# Altium PCB PCB2.PcbDoc
Units mm, origin at the board's own origin, x right, y up, seen from the top; angles counter-clockwise.
Board outline 45.7 x 53.5 mm, 2 copper layers (Top Layer, Bottom Layer); 23 components, 25 nets, 78 pads, 4 vias.
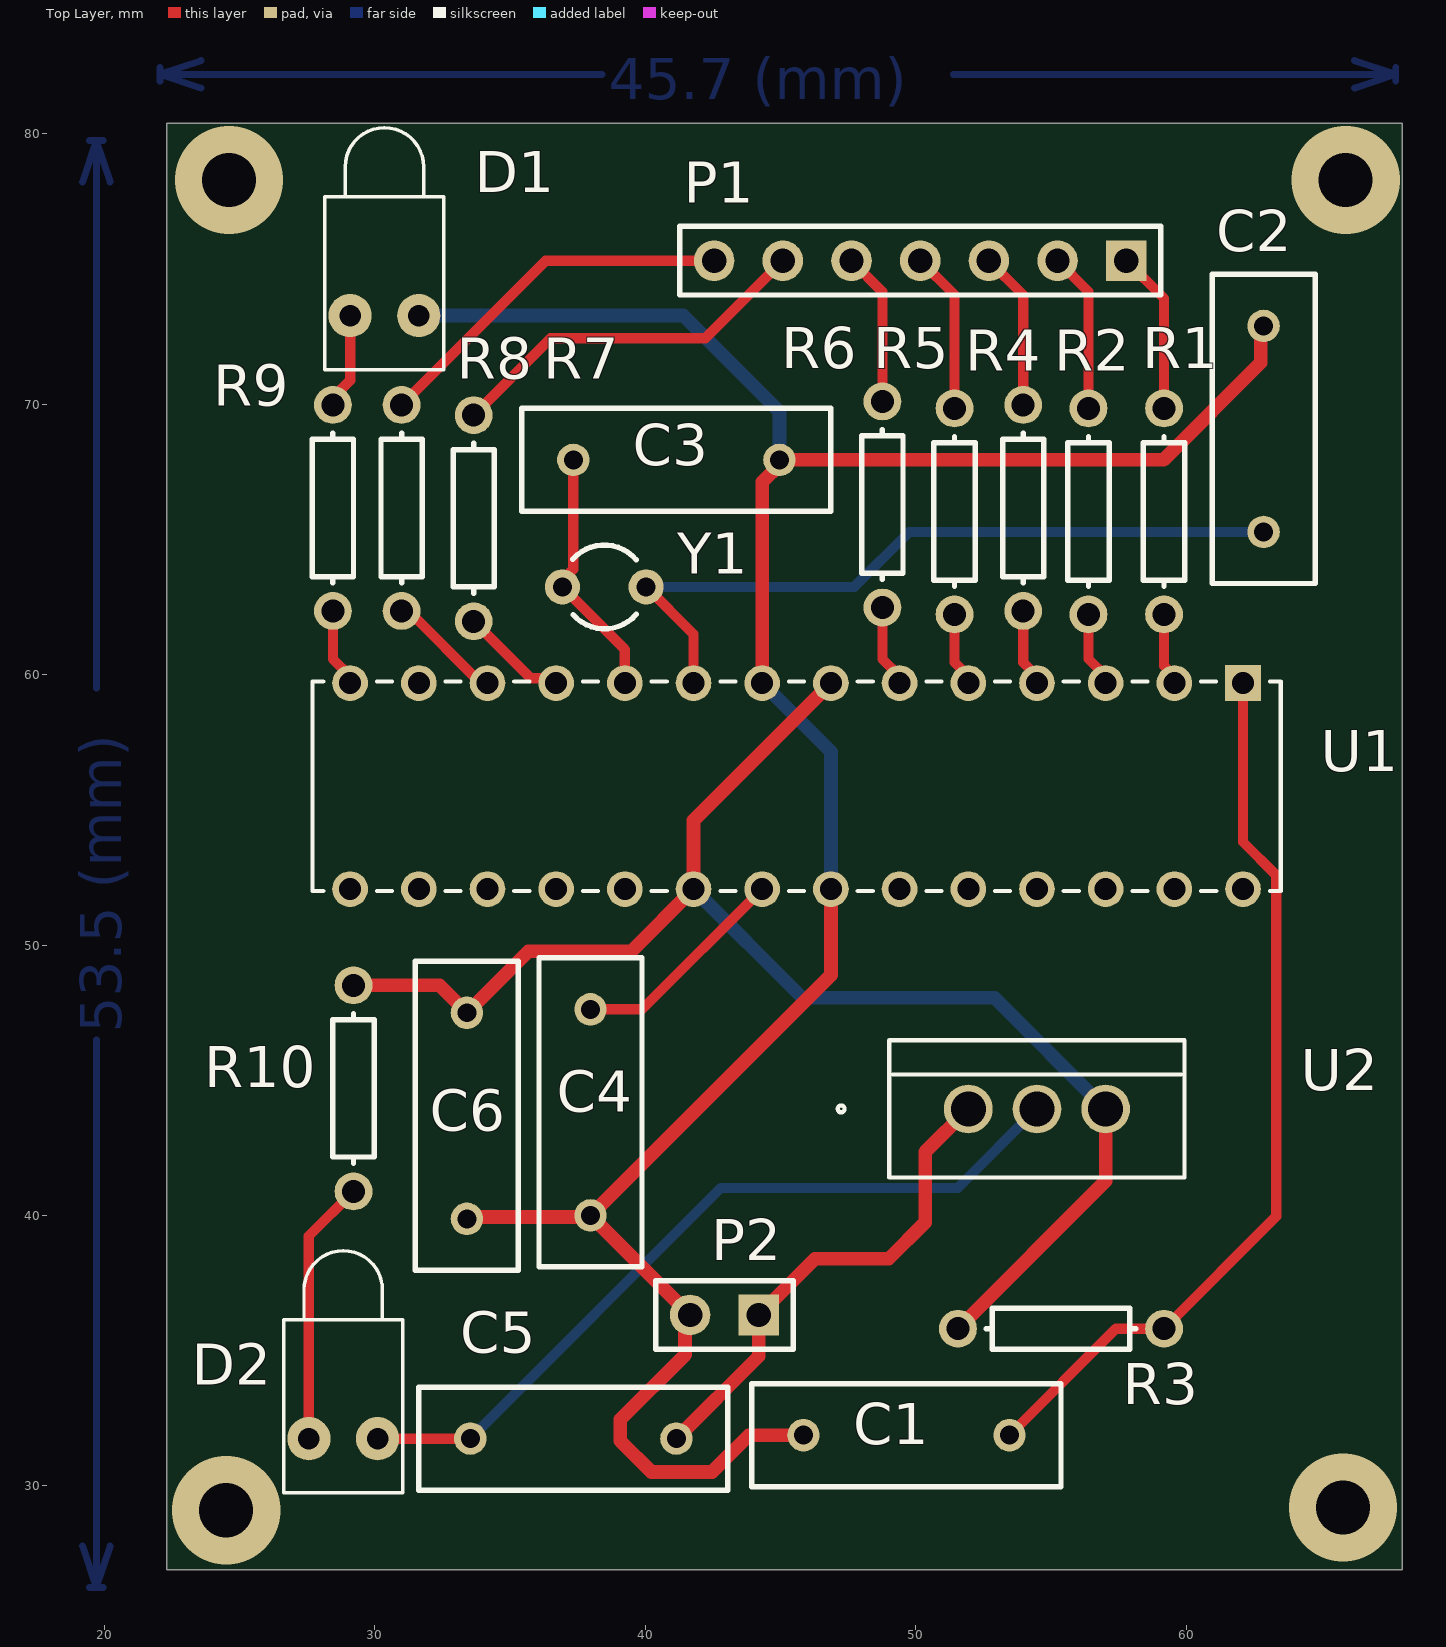
[diagram p0: Top Layer view]
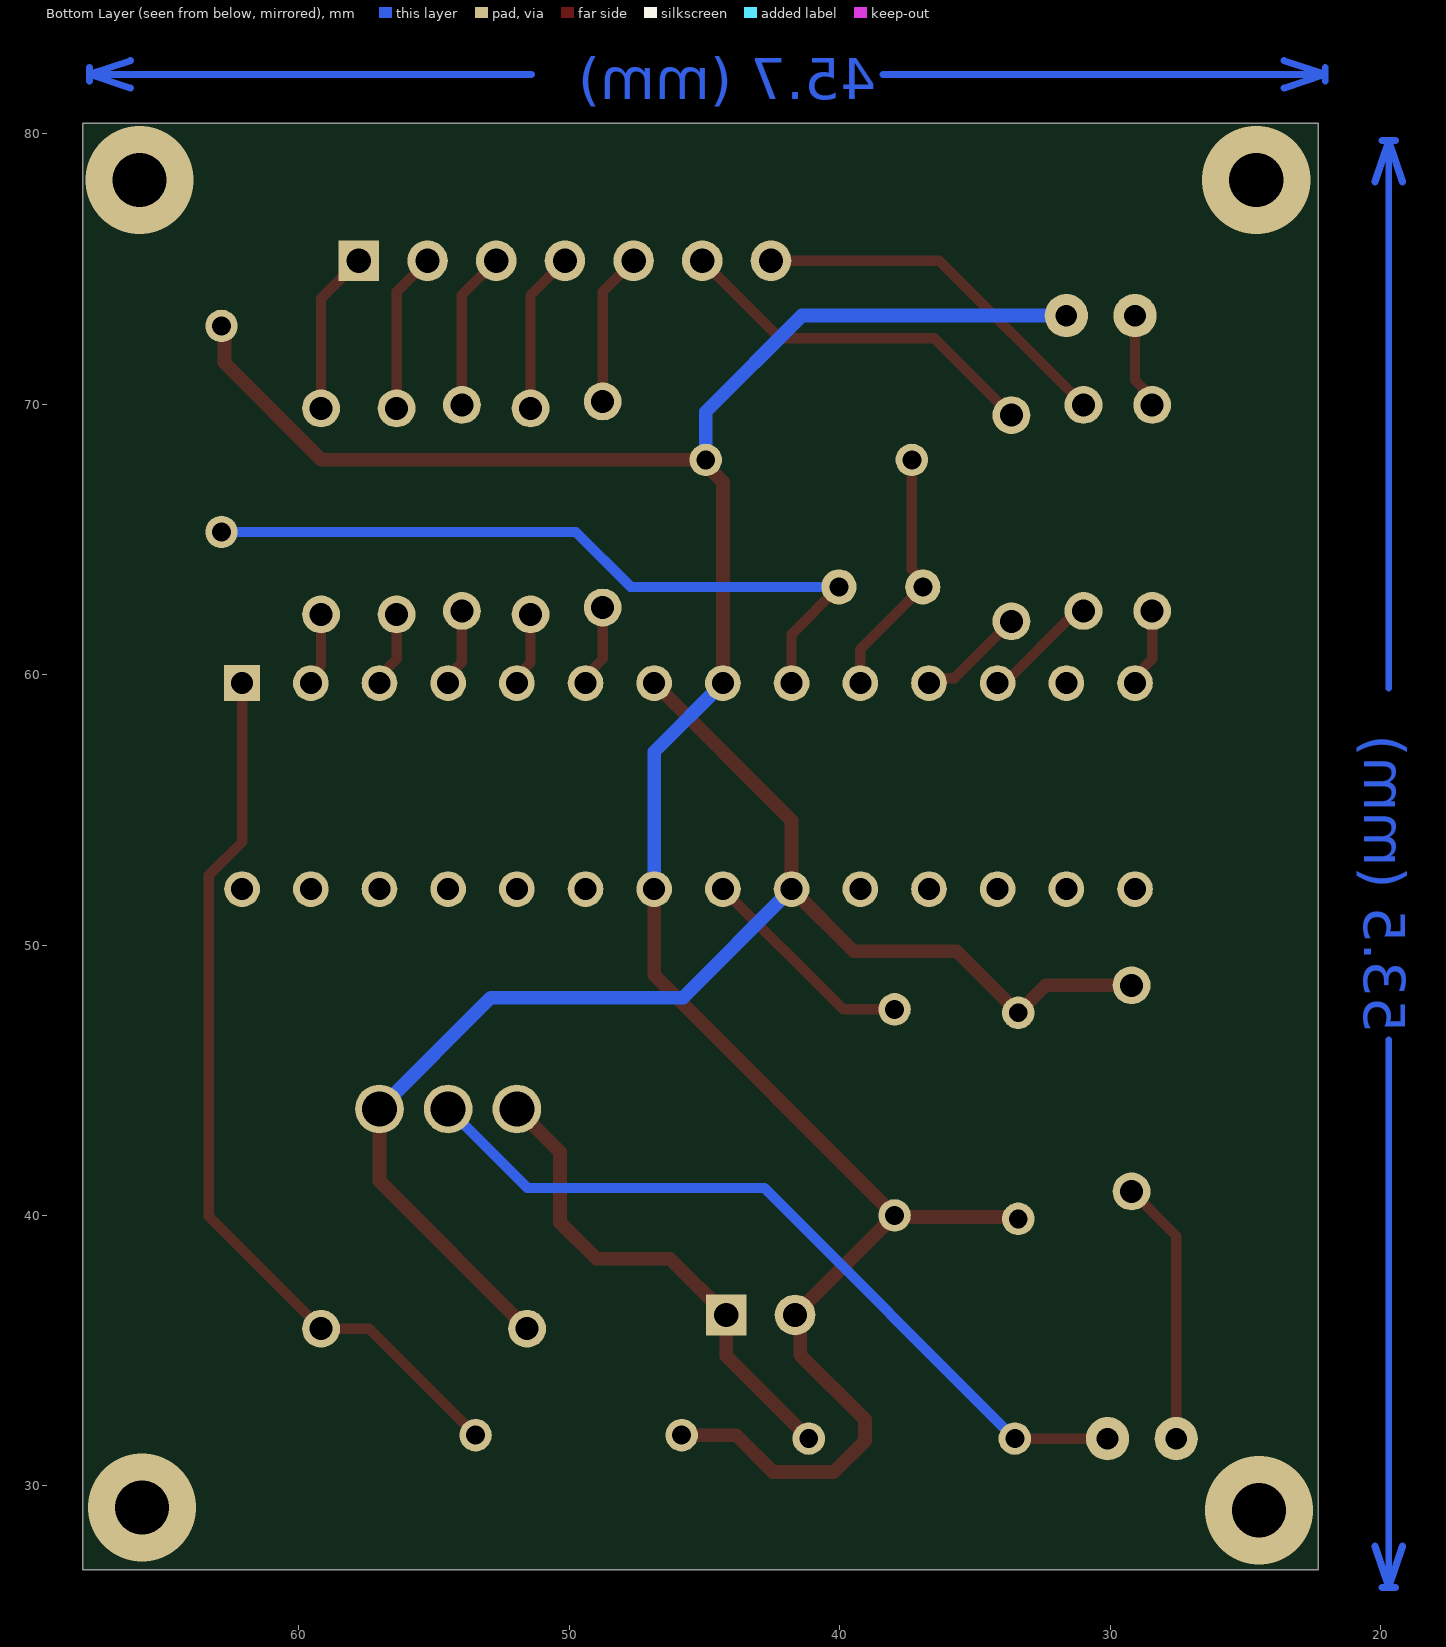
[diagram p1: Bottom Layer view, seen from below]

## Layer stack, top to bottom
Top Solder: solder mask 0.0102, Solder Resist, Dk 3.5
Top Layer: signal copper 0.0356
Dielectric 1: dielectric 0.32, FR-4, Dk 4.8
Bottom Layer: signal copper 0.0356
Bottom Solder: solder mask 0.0102, Solder Resist, Dk 3.5

## Board outline
22.3,26.9 68,26.9 68,80.4 22.3,80.4

## Design rules (kind name [scope] priority, off if disabled: settings)
Clearance [All] p1: gap=0.381 ignorepadtopadclearanceinfootprint=FALSE except(0.508: Arc-Hole Track-Hole SMDPad-Hole THPad-Hole Via-Hole Fill-Hole Poly-Hole Region-Hole Text-Hole)
PolygonConnect [All] p1: connectstyle=Relief reliefconductorwidth=0.254 reliefentries=4 polygonreliefangle="90 Angle" airgapwidth=0.254
RoutingVias [All] p1: holewidth=0.711 width=1.27 viastyle="Through Hole" minholewidth=0.711 minwidth=1.27 maxholewidth=4 maxwidth=5
SilkToSolderMaskClearance [IsPad] p1: minsilkscreentomaskgap=0.208 clearancetoexposedcopper=TRUE
SolderMaskExpansion [All] p1: expansion=0.102 istentingtop=FALSE
Width Width_1 [InNet('5V') or InNet('GND') or InNet('VCC')] p1: maxlimit=0.635 minlimit=0.381 preferedwidth=0.508
Width [All] p2: maxlimit=0.508 minlimit=0.254 preferedwidth=0.381 minimp=50.000000 maximp=50.000000 favimp=50.000000
29 further rules are at their usual default settings.

## Components (designator, comment, footprint, x,y, rotation, side; value= is the part's Value field where it differs from the comment)
C1 "Cap3" RAD-0.3 49.657,31.877 r0 top
C2 "Cap1" RAD-0.3 62.865,69.088 r270 top value=22pF
C3 "Cap2" RAD-0.3 41.148,67.945 r180 top value=22pF
C4 "Cap" RAD-0.3 37.973,43.815 r90 top value=100nF
C5 "Cap4" RAD-0.3 37.338,31.75 r0 top value=330nF
C6 "Cap5" RAD-0.3 33.401,43.688 r90 top value=100nF
D1 "LED1" LED-1 30.353,73.279 r90 top
D2 "LED1" LED-1 28.829,31.75 r90 top
P1 "Header 7" HDR1X7 57.785,75.311 r180 top
P2 "Header 2" HDR1X2 44.196,36.322 r180 top
R1 "R1" AXIAL-0.3 59.182,66.04 r90 top value=0.1K
R2 "R2" AXIAL-0.3 56.388,66.04 r90 top value=0.1K
R3 "Res1" AXIAL-0.3 55.372,35.814 r180 top value=10K
R4 "R3" AXIAL-0.3 53.975,66.167 r90 top value=0.1K
R5 "R4" AXIAL-0.3 51.435,66.04 r90 top value=0.1K
R6 "R5" AXIAL-0.3 48.768,66.294 r90 top value=0.1K
R7 "R6" AXIAL-0.3 33.655,65.786 r90 top value=0.1K
R8 "R7" AXIAL-0.3 30.988,66.167 r90 top value=0.1K
R9 "Resistor" AXIAL-0.3 28.448,66.167 r90 top value=0.22K
R10 "Res2" AXIAL-0.3 29.21,44.704 r270 top value=1K
U1 "ATMEGA328-PU" 28P3_SPDIP28_SP_MCH 62.103,59.69 r270 top
U2 "LM7805CT" TO-220_FAS 51.943,43.942 r0 top
Y1 "XTAL1" R38 38.481,63.246 r90 top value=16MHz

## Footprints (in the part's own frame and the unit in brackets; to place one, negate y for a bottom-side part, rotate by r counter-clockwise, add the part's x,y. Pads: shape width x height; smd on the part's side, far side on the other; paste and mask are expansions set on the pad)
28P3_SPDIP28_SP_MCH [mil]
  rect 52x52 hole 32 mask+0: 1(0,0)
  round 52 hole 32 mask+0: 2(0,-100) 3(0,-200) 4(0,-300) 5(0,-400) 6(0,-500) 7(0,-600) 8(0,-700) 9(0,-800) 10(0,-900) 11(0,-1000) 12(0,-1100) 13(0,-1200) 14(0,-1300) 15(300,-1300) 16(300,-1200) 17(300,-1100) 18(300,-1000) 19(300,-900) 20(300,-800) 21(300,-700) 22(300,-600) 23(300,-500) 24(300,-400) 25(300,-300) 26(300,-200) 27(300,-100) 28(300,0)
  silkscreen extent -3,-1355 303,55, body extent 0,0 10,10, height 10
AXIAL-0.3 [mm] "Axial Device, Thru-Hole; 2 Leads; 0.3 in Pin Spacing"
  round 1.4 hole 0.85: 1(-3.81,0) 2(3.81,0)
  silkscreen extent -2.77,-0.76 2.77,0.76
HDR1X2 [mm] "Connector; Header; 2 Position"
  rect 1.5x1.5 hole 0.9: 1(0,0)
  round 1.5 hole 0.9: 2(2.54,0)
  silkscreen extent -1.27,-1.27 3.81,1.27
HDR1X7 [mm] "Connector; Header; 7 Position"
  rect 1.5x1.5 hole 0.9: 1(0,0)
  round 1.5 hole 0.9: 2(2.54,0) 3(5.08,0) 4(7.62,0) 5(10.16,0) 6(12.7,0) 7(15.24,0)
  silkscreen extent -1.27,-1.27 16.51,1.27
LED-1 [mm] "LED; 2 Leads"
  round 1.6 hole 0.8: 1(0,1.27) 2(0,-1.27)
  silkscreen extent -2,-2.2 6.95,2.2
R38 [mm] "Crystal, Thru-Hole; 2 Leads; Body 3.1 x 8.2 mm (Dia.xH)"
  round 1.3 hole 0.7: 1(0,1.55) 2(0,-1.55)
  silkscreen extent -1.55,-1.19 1.55,1.17
RAD-0.3 [mm] "Radial Cap, Thru-Hole; 2 Leads; 0.3 in Pin Spacing"
  round 1.2 hole 0.7: 1(-3.81,0) 2(3.81,0)
  silkscreen extent -5.71,-1.91 5.71,1.91
TO-220_FAS [mil]
  round 71 hole 51 mask+0: 1(0,0) 2(100,0) 3(200,0)
  silkscreen extent -190,-100 315,100, body extent 0,0 10,10, height 10

## Part data
C1 C2 C3 C5 C6: library part Cap, "Capacitor", LatestRevisionDate=17-Jul-2002, LatestRevisionNote="Re-released for DXP Platform.", PackageDescription="Radial Cap, Thru-Hole; 2 Leads; 0.3 in Pin Spacing", PackageReference=RAD-0.3, Published=8-Jun-2000, Publisher="Altium Limited"
C4: "Capacitor", LatestRevisionDate=17-Jul-2002, LatestRevisionNote="Re-released for DXP Platform.", PackageDescription="Radial Cap, Thru-Hole; 2 Leads; 0.3 in Pin Spacing", PackageReference=RAD-0.3, Published=8-Jun-2000, Publisher="Altium Limited"
D1 D2: "Typical RED GaAs LED", LatestRevisionDate=08-Jul-2005, LatestRevisionNote="Mech Layer 1 removed.", PackageDescription="LED; 2 Leads", PackageReference=LED-1, Published=8-Jun-2000, Publisher="Altium Limited"
P1: "Header, 7-Pin", LatestRevisionDate=17-Jul-2002, LatestRevisionNote="Re-released for DXP Platform.", Publisher="Altium Limited"
P2: "Header, 2-Pin", LatestRevisionDate=17-Jul-2002, LatestRevisionNote="Re-released for DXP Platform.", Publisher="Altium Limited"
R1 R2 R4 R5 R6 R7 R8 R10: library part Res1, "Resistor", LatestRevisionDate=17-Jul-2002, LatestRevisionNote="Re-released for DXP Platform.", PackageDescription="Axial Device, Thru-Hole; 2 Leads; 0.3 in Pin Spacing", PackageReference=AXIAL-0.3, Published=8-Jun-2000, Publisher="Altium Limited"
R3: "Resistor", LatestRevisionDate=17-Jul-2002, LatestRevisionNote="Re-released for DXP Platform.", PackageDescription="Axial Device, Thru-Hole; 2 Leads; 0.3 in Pin Spacing", PackageReference=AXIAL-0.3, Published=8-Jun-2000, Publisher="Altium Limited"
R9: library part Res1, LatestRevisionDate=17-Jul-2002, LatestRevisionNote="Re-released for DXP Platform.", PackageDescription="Axial Device, Thru-Hole; 2 Leads; 0.3 in Pin Spacing", PackageReference=AXIAL-0.3, Published=8-Jun-2000, Publisher="Altium Limited"
U1 U2: "No Description Available", Copyright="Copyright (C) 2018 Accelerated Designs. All rights reserved", RefDes=RefDes, Type=DEV
  U1: Built_By=EMA_Cory, Datasheet=https://ww1.microchip.com/downloads/en/DeviceDoc/ATmega48A-PA-88A-PA-168A-PA-328-P-DS-DS40002061B.pdf, Manufacturer_Part_Number=ATMEGA328-PU, SourceLibrary=Update_to_database_2021-05-13, Vendor=Microchip
  U2: Built_By=EMA_UL_Team, Manufacturer_Part_Number=LM7805CT, SourceLibrary=Fairchild_2008-01-01_, Vendor="Fairchild Semiconductor"
Y1: library part XTAL, "Crystal Oscillator", LatestRevisionDate=17-Jul-2002, LatestRevisionNote="Re-released for DXP Platform.", PackageDescription="Crystal, Thru-Hole; 2 Leads; Body 3.1 x 8.2 mm (Dia.xH)", PackageReference=R38, Published=8-Jun-2000, Publisher="Altium Limited"

## Via types
v1: diameter 4, hole 2, Top Layer to Bottom Layer, 4 vias

## Nets (pads, with @x,y where several pads share a name; then routed paths per layer and width w, separated by ;. In a path a pad name is that pad's centre, name@x,y a point inside that pad or via, vN(x,y) a via of type N, cw(c..) or ccw(c..) an arc to the next point about the centre after c; other vN are vias at no path point)
5V: C6.2 R3.2 R10.1 U1.7 U1.20 U2.3 | length 53.6
  Top Layer w0.508: R10.1 32.385,48.514 C6.2 35.675,49.772 39.485,49.772 U1.20 41.783,54.61 U1.7 ; R3.2 57.023,41.275 U2.3
  Bottom Layer w0.508: U1.20 45.801,48.052 52.913,48.052 U2.3
GND: C1.1 C2.1 C3.1 C4.1 C6.1 D1.2 P2.2 U1.8 U1.22 | length 93.6
  Top Layer w0.508: C6.1 33.465,39.941 37.91,39.941 C4.1 ; U1.8 44.323,67.123 44.958,67.758 C3.1 59.165,67.945 62.756,71.536 62.756,72.789 C2.1 ; C1.1 43.829,31.877 42.467,30.515 40.224,30.515 39.072,31.667 39.072,32.454 41.466,34.848 41.466,36.132 P2.2 C4.1 ; U1.22 46.863,48.895 C4.1
  Bottom Layer w0.508: D1.2 41.402,73.279 44.958,69.723 C3.1 ; U1.8 46.863,57.15 U1.22
NetC1_2: C1.2 R3.1 U1.1 | length 33.5
  Top Layer w0.381: C1.2 57.404,35.814 R3.1 63.335,39.967 63.335,52.58 62.103,53.812 U1.1
NetC2_2: C2.2 U1.9 Y1.2 | length 28
  Top Layer w0.381: Y1.2 41.783,61.494 U1.9
  Bottom Layer w0.381: Y1.2 47.732,63.246 49.764,65.278 C2.2
NetC3_2: C3.2 U1.10 Y1.1 | length 9.4
  Top Layer w0.381: C3.2 37.338,63.902 36.931,63.495 Y1.1 39.243,60.934 U1.10
NetC4_2: C4.2 U1.21 | length 8.2
  Top Layer w0.381: C4.2 39.878,47.625 U1.21
NetC5_1: C5.1 D2.2 U2.2 | length 29.4
  Top Layer w0.381: D2.2 C5.1
  Bottom Layer w0.381: C5.1 42.799,41.021 51.562,41.021 U2.2
NetD1_1: D1.1 R9.2 | length 3.7
  Top Layer w0.254: R9.2 R9.2@28.511,70.04
  Top Layer w0.381: R9.2 28.448,70.253 29.083,70.888 D1.1
NetD2_1: D2.1 R10.2 | length 9.8
  Top Layer w0.381: D2.1 27.559,39.243 R10.2
NetP1_1: P1.1 R1.2 | length 6
  Top Layer w0.381: P1.1 59.182,73.914 R1.2
NetP1_2: P1.2 R2.2 | length 5.9
  Top Layer w0.381: P1.2 56.388,74.168 R2.2
NetP1_3: P1.3 R4.2 | length 5.9
  Top Layer w0.381: P1.3 53.975,74.041 R4.2
NetP1_4: P1.4 R5.2 | length 6
  Top Layer w0.381: P1.4 51.435,74.041 R5.2
NetP1_5: P1.5 R6.2 | length 5.7
  Top Layer w0.381: P1.5 48.768,74.168 R6.2
NetP1_6: P1.6 R7.2 | length 13.8
  Top Layer w0.381: R7.2 36.503,72.444 42.218,72.444 P1.6
NetP1_7: P1.7 R8.2 | length 13.8
  Top Layer w0.381: R8.2 36.322,75.311 P1.7
NetR1_1: R1.1 U1.2 | length 2.7
  Top Layer w0.381: R1.1 59.182,60.325 59.563,59.944 U1.2
NetR2_1: R2.1 U1.3 | length 2.8
  Top Layer w0.381: R2.1 56.388,60.579 57.023,59.944 U1.3
NetR4_1: R4.1 U1.4 | length 2.9
  Top Layer w0.381: R4.1 53.975,60.452 54.483,59.944 U1.4
NetR5_1: R5.1 U1.5 | length 3.1
  Top Layer w0.254: U1.5 52.133,59.88 U1.5@52.07,59.817
  Top Layer w0.381: R5.1 51.435,60.452 51.943,59.944 U1.5
NetR6_1: R6.1 U1.6 | length 3.4
  Top Layer w0.254: U1.6 49.593,59.88 U1.6@49.53,59.817
  Top Layer w0.381: R6.1 48.768,60.579 49.403,59.944 U1.6
NetR7_1: R7.1 U1.11 | length 4
  Top Layer w0.381: R7.1 35.761,59.87 36.523,59.87 U1.11
NetR8_1: R8.1 U1.12 | length 4.3
  Top Layer w0.381: R8.1 31.242,62.357 33.909,59.69 U1.12
NetR9_1: R9.1 U1.14 | length 2.9
  Top Layer w0.381: R9.1 28.448,60.579 29.083,59.944 U1.14
VCC: C5.2 P2.1 U2.1 | length 18.3
  Top Layer w0.508: C5.2 44.196,34.798 P2.1 46.274,38.4 49.002,38.4 50.349,39.746 50.349,42.348 U2.1
pads on no net: U1.13 U1.15 U1.16 U1.17 U1.18 U1.19 U1.23 U1.24 U1.25 U1.26 U1.27 U1.28
copper on no net: | length 88.1
  Bottom Layer w0.254: 19.192,27.774 19.7,26.25 ; 19.192,78.226 19.7,79.75 ; 19.446,26.25 19.954,26.25 ; 19.446,79.75 19.954,79.75 ; 19.7,46.499 19.7,26.25 ; 19.7,59.5 19.7,79.75 ; 20.208,27.774 19.7,26.25 ; 20.208,78.226 19.7,79.75 ; 22.05,81.946 22.05,82.454 ; 23.574,81.692 22.05,82.2 ; 23.574,82.708 22.05,82.2 ; 38.399,82.2 22.05,82.2 ; 51.4,82.2 67.75,82.2 ; 66.226,81.692 67.75,82.2 ; 66.226,82.708 67.75,82.2 ; 67.75,81.946 67.75,82.454
  other v1: 24.5,29.1 65.8,29.2 24.6,78.3 65.9,78.3

## Other copper
Bottom Layer:
  text "45.7 (mm)" at 38.653,81.286 h1.52
  text "53.5 (mm)" at 20.614,46.753 h1.52 r90

## Text inside footprints (layer, text, board x,y; h text height)
U1: Mechanical 13 "*" at 61.468,59.69 h1.27 r270
U2: Mechanical 13 "TAB" at 54.007,45.405 h0.64